# EAGLE board usbInterface (EAGLE 6.1)
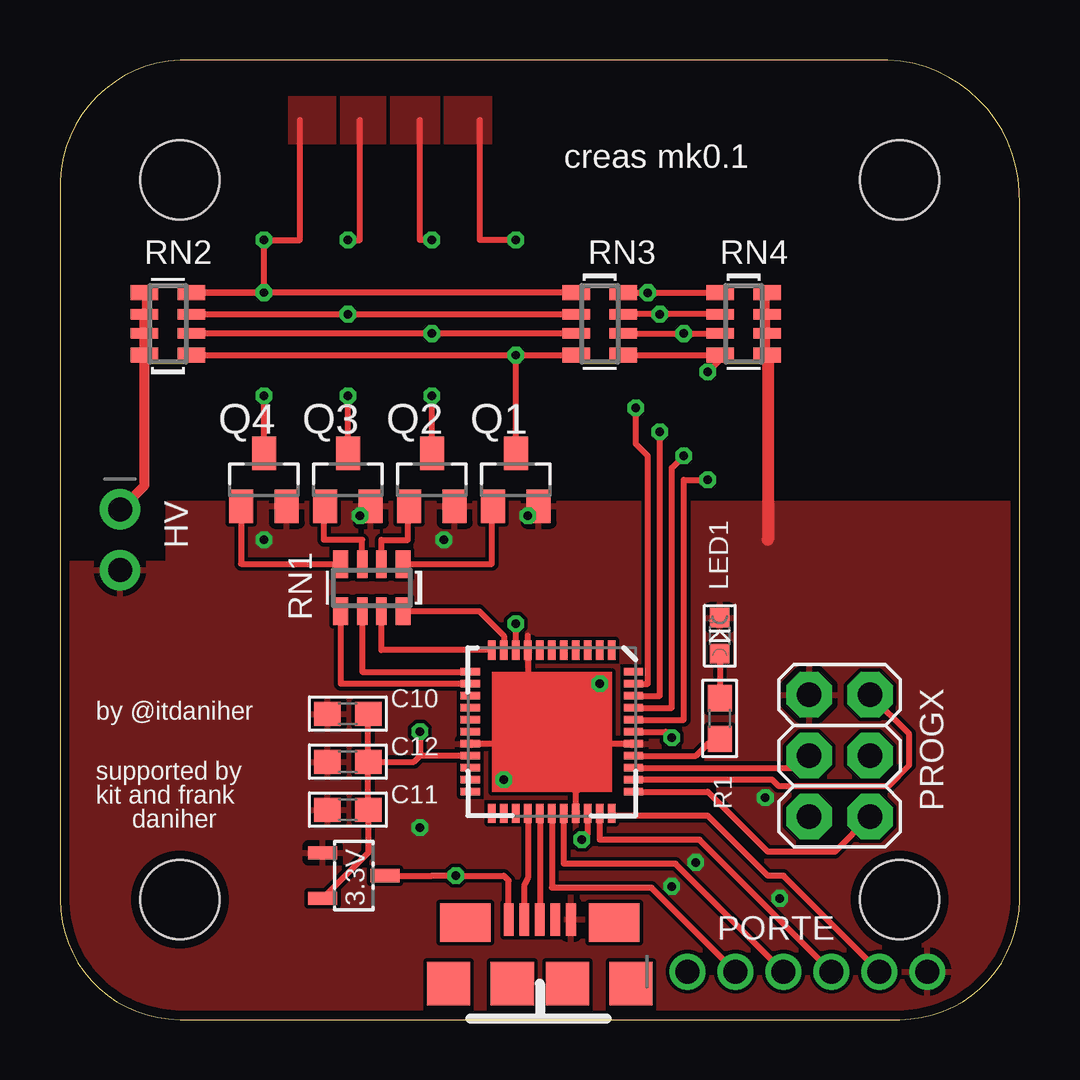
[diagram p0: board, top side]
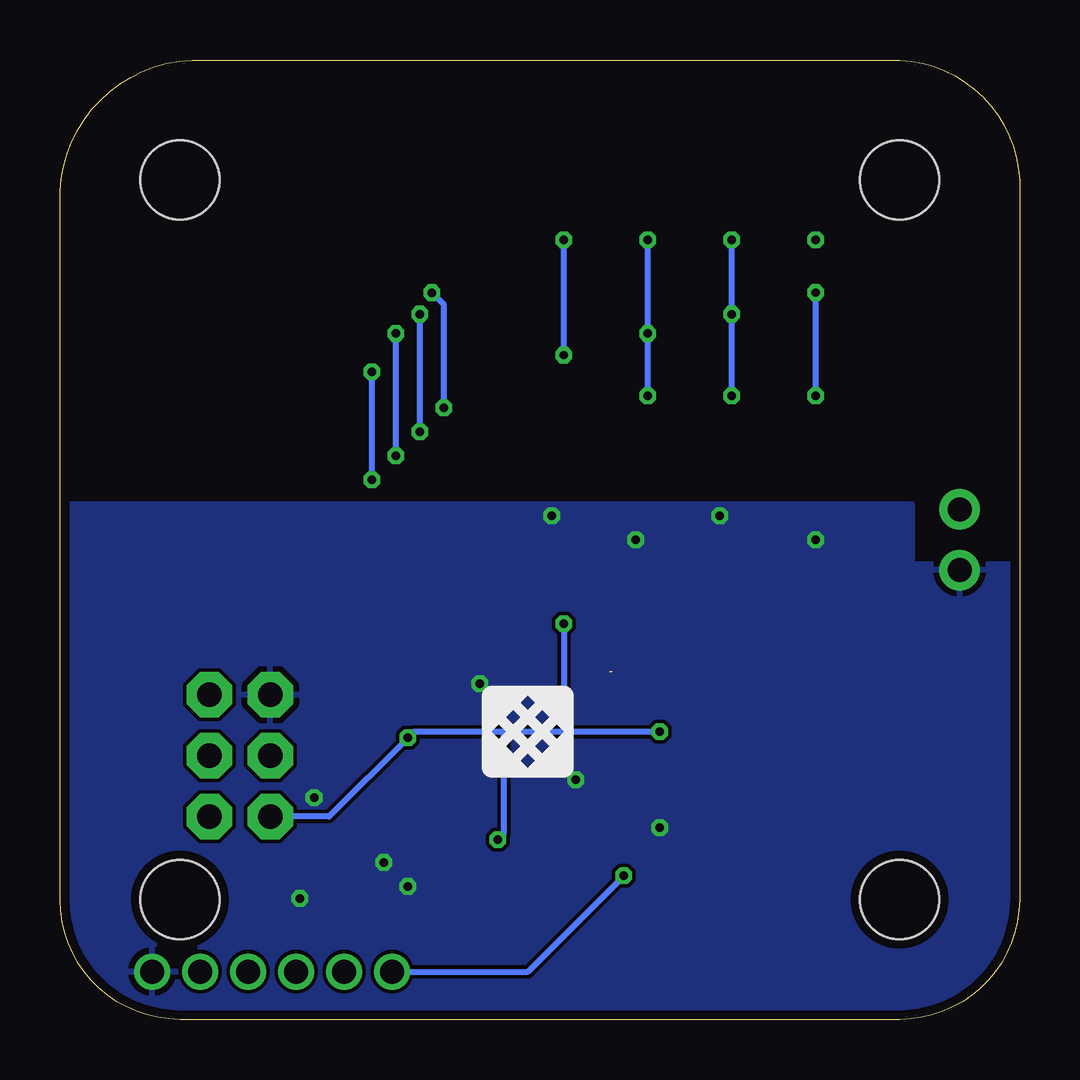
[diagram p1: board, bottom side, seen from below]

Size 40 x 40 mm. Coordinates in mm from the lower left corner, seen from the top.
Outline: 0,34.5 0,5 arc90 5,0 35,0 arc90 40,5 40,34 arc90 34.5,40 5,40 arc90 0,34.5
Copper layers (1*16): Top 0.0356mm / dielectric 1.5011mm / Bottom 0.0356mm
Design rules: minimum track width 6mil, minimum drill 13mil, track to track 6mil, track to pad 6mil, pad to pad 6mil, via to via 6mil, smd to smd 6mil, copper to edge 15mil, drill to drill 6mil, minimum pad ring 7mil, minimum via ring 7mil, stop-mask expansion 4mil, vias tented up to drill 0mil, thermal gap 10mil

## Footprints (pad centres in the part's own frame; a part is rotated, then mirrored left to right if it is on the bottom)
SOT23-3 = smd 0.55 x 1.2: 1 0.95,1.3; 2 -0.95,1.3; 3 0,-1.3
0603 = smd 1.1 x 1: 1 -0.85,0; 2 0.85,0
USB-MICROB = smd 0.4 x 1.35: P1 -1.3,2.675; P2 -0.65,2.675; P3 0,2.675; P4 0.65,2.675; P5 1.3,2.675 | smd 1.8 x 1.8: PAD-LB -1.15,0; PAD-LLB -3.8,0; PAD-RB 1.15,0; PAD-RRB 3.8,0 | smd 2.1 x 1.6: PAD-LT -3.1,2.55; PAD-RT 3.1,2.55
1X02_ROUND = drill 1 pad 1.676: 1 -1.27,0; 2 1.27,0
CHIPLED_0603 = smd 0.8 x 0.8: A 0,-0.75; C 0,0.75
1X06_ROUND_2MM = drill 1 pad 1.5: 1 0.16,0; 2 2.16,0; 3 4.16,0; 4 6.16,0; 5 8.16,0; 6 10.16,0
2X03 = drill 1.016 pad 1.88 octagon: 1 -2.54,-1.27; 2 -2.54,1.27; 3 0,-1.27; 4 0,1.27; 5 2.54,-1.27; 6 2.54,1.27
SOT23 = smd 1 x 1.4: 1 -0.95,-1.1; 2 0.95,-1.1; 3 0,1.1
RN8P-4R-CRA06S = smd 0.63 x 1.15: 1 -1.295,-0.975; 4 1.295,-0.975; 5 1.295,0.975; 8 -1.295,0.975 | smd 0.44 x 1.15: 2 -0.4,-0.975; 3 0.4,-0.975; 6 0.4,0.975; 7 -0.4,0.975
STAND-OFF = hole 3.302: 0,0
QFN-44 = smd 0.8 x 0.3: 1 -3.4,2.5; 2 -3.4,2; 3 -3.4,1.5; 4 -3.4,1; 5 -3.4,0.5; 6 -3.4,0; 7 -3.4,-0.5; 8 -3.4,-1; 9 -3.4,-1.5; 10 -3.4,-2; 11 -3.4,-2.5; 23 3.4,-2.5; 24 3.4,-2; 25 3.4,-1.5; 26 3.4,-1; 27 3.4,-0.5; 28 3.4,0; 29 3.4,0.5; 30 3.4,1; 31 3.4,1.5; 32 3.4,2; 33 3.4,2.5 | smd 0.3 x 0.8: 12 -2.5,-3.4; 13 -2,-3.4; 14 -1.5,-3.4; 15 -1,-3.4; 16 -0.5,-3.4; 17 0,-3.4; 18 0.5,-3.4; 19 1,-3.4; 20 1.5,-3.4; 21 2,-3.4; 22 2.5,-3.4; 34 2.5,3.4; 35 2,3.4; 36 1.5,3.4; 37 1,3.4; 38 0.5,3.4; 39 0,3.4; 40 -0.5,3.4; 41 -1,3.4; 42 -1.5,3.4; 43 -2,3.4; 44 -2.5,3.4

## Placement (x,y rotation side)
3.3V  VREG  [SOT23-3]  12.25,6 90 top
C10  1uF  [0603]  12,12.75 0 top
C11  .1uF  [0603]  12,8.75 0 top
C12  .01uF  [0603]  12,10.75 0 top
CN1  [USB-MICROB]  20,1.5 0 top
HV  [1X02_ROUND]  2.5,20 270 top
LED1  [CHIPLED_0603]  27.5,16 0 top
PORTE  [1X06_ROUND_2MM]  26,2 0 top
PROGX  [2X03]  32.5,11 90 top
Q1  [SOT23]  19,22.5 0 top
Q2  [SOT23]  15.5,22.5 0 top
Q3  [SOT23]  12,22.5 0 top
Q4  [SOT23]  8.5,22.5 0 top
R1  120o  [0603]  27.5,12.55 90 top
RN1  [RN8P-4R-CRA06S]  13,18 180 top
RN2  [RN8P-4R-CRA06S]  4.5,29 90 top
RN3  [RN8P-4R-CRA06S]  22.5,29 270 top
RN4  [RN8P-4R-CRA06S]  28.5,29 270 top
U$1  [STAND-OFF]  5,5 0 top
U$2  [STAND-OFF]  35,5 0 top
U$3  [STAND-OFF]  5,35 0 top
U$4  [STAND-OFF]  35,35 0 top
U$5  [LOGO_NONOLITH]  22.4,10.1 0 bottom
XM1  [QFN-44]  20.5,12 270 top

## Library data of the parts
3.3V C10-C12 CN1 HV PORTE PROGX R1 RN1-RN4 U$1-U$5 XM1 = nonolith
LED1 = microbuilder
Q1-Q4 = dp_devices

## Nets
3.3V: 3.3V.2 C10.2 C11.2 C12.2 PROGX.2 XM1.9 XM1.19 XM1.31 XM1.39
5V: 3.3V.3 CN1.P1 PORTE.1
ADCA: RN3.5 RN4.4 XM1.40
ADCB: RN3.6 RN4.3 XM1.41
ADCC: RN3.7 RN4.2 XM1.42
ADCD: RN3.8 RN4.1 XM1.43
BOOTLOAD: PROGX.4 XM1.36
CELLA: Q1.3 RN2.1 RN3.4
CELLB: Q2.3 RN2.2 RN3.3
CELLC: Q3.3 RN2.3 RN3.2
CELLD: Q4.3 RN2.4 RN3.1
GATEA: Q1.1 RN1.1
GATEB: Q2.1 RN1.2
GATEC: Q3.1 RN1.3
GATED: Q4.1 RN1.4
GND: 3.3V.1 C10.1 C11.1 C12.1 CN1.P5 HV.2 LED1.C PORTE.6 PROGX.6 Q1.2 Q2.2 Q3.2 Q4.2 RN4.5 RN4.6 RN4.7 RN4.8 XM1.8 XM1.18 XM1.30 XM1.38
HV: HV.1 RN2.5 RN2.6 RN2.7 RN2.8
OC0A: RN1.8 XM1.10
OC0B: RN1.7 XM1.11
OC0C: RN1.6 XM1.12
OC0D: RN1.5 XM1.13
PDI-CLK: PROGX.5 XM1.35
PDI-DATA: PROGX.1 XM1.34
PE0: PORTE.2 XM1.28
PE1: PORTE.3 XM1.29
PE2: PORTE.4 XM1.32
PE3: PORTE.5 XM1.33
PR1: R1.1 XM1.37
PR1-P: LED1.A R1.2
USB+: CN1.P3 XM1.27
USB-: CN1.P2 XM1.26

## Tracks (layer width: path | path; a pad name or v marks a point on that pad's centre or on a via)
3.3V  (via drill 0.35)
  Top 0.254: XM1.19 15,11 | v15,12 15,11 | v21.75,7.5 22,7.75 XM1.31 | C12.2 C10.2 | C12.2 C11.2 12.85,6.95 3.3V.2 | XM1.9 v19,16.5 | XM1.39 25.25,12 v25.5,11.75 | C12.2 14.75,10.75 15,11
  Bottom 0.254: v21.75,7.5 21.5,7.75 21.5,12 | v15,12 19,12 | 19,12 21.5,12 | v19,16.5 19,12 | 21.5,12 25.25,12 v25.5,11.75 28.79,8.46 PROGX.2
5V  (via drill 0.35)
  Top 0.254: CN1.P1 18.7,5.8 18.5,6 v16.5,6 15.5,6 3.3V.3
  Bottom 0.254: PORTE.1 20.5,2 v16.5,6
ADCA  (via drill 0.35)
  Top 0.254: XM1.40 26,12.5 26,22.5 v27,22.5 | RN3.5 RN4.4 27.53,27.73 27.5,27.75 27.5,27.5 v27,27
  Bottom 0.254: v27,22.5 v27,27
ADCB  (via drill 0.35)
  Top 0.254: XM1.41 25.5,13 25.5,23 v26,23.5 | RN3.6 v26,28.6 RN4.3
  Bottom 0.254: v26,23.5 v26,28.6
ADCC  (via drill 0.35)
  Top 0.254: XM1.42 25,13.5 v25,24.5 | RN4.2 v25,29.4 RN3.7
  Bottom 0.254: v25,24.5 v25,29.4
ADCD  (via drill 0.35)
  Top 0.254: XM1.43 24.5,14 24.5,23.5 24,24 v24,25.5 | RN3.8 v24.5,30.3 RN4.1
  Bottom 0.254: v24,25.5 24,29.8 v24.5,30.3
BOOTLOAD
  Top 0.254: XM1.36 30.73,10.5 PROGX.4
CELLA  (via drill 0.35)
  Top 0.254: RN2.1 v19,27.7 | v19,27.7 RN3.4 | Q1.3 v19,27.7 | v19,32.5 17.5,32.5 17.5,37.5
  Bottom 0.254: v19,27.7 v19,32.5
  pour Top (isolate 0.152, no thermals): 16,38.5 18,38.5 18,36.5 16,36.5
CELLB  (via drill 0.35)
  Top 0.254: RN3.3 v15.5,28.6 RN2.2 | Q2.3 v15.5,26 | v15.5,32.5 15,32.5 15,37.5
  Bottom 0.254: v15.5,26 v15.5,28.6 v15.5,32.5
  pour Top (isolate 0.152, rank 2, no thermals): 13.75,38.5 16,38.5 16,36.5 13.75,36.5
CELLC  (via drill 0.35)
  Top 0.254: RN2.3 v12,29.4 RN3.2 | Q3.3 v12,26 | v12,32.5 12.5,32.5 12.5,37.5
  Bottom 0.254: v12,26 v12,29.4 v12,32.5
  pour Top (isolate 0.152, rank 3, no thermals): 11.5,38.5 13.75,38.5 13.75,36.5 11.5,36.5
CELLD  (via drill 0.35)
  Top 0.254: RN3.1 RN2.4 v8.5,30.3 v8.5,32.5 10,32.5 10,37.5 | Q4.3 v8.5,26
  Bottom 0.254: v8.5,26 v8.5,30.3
  pour Top (isolate 0.152, no thermals): 9.5,38.5 11.5,38.5 11.5,36.5 9.5,36.5
GATEA
  Top 0.254: 14.3,19 18,19 18,21.4
  Top 0.406: RN1.1 14.3,19 | 18,21.4 Q1.1
GATEB
  Top 0.254: RN1.2 13.4,20 14.5,20 14.5,21.4
  Top 0.406: 14.5,21.4 Q2.1
GATEC
  Top 0.254: RN1.3 12.6,20 11,20 11,21.4
  Top 0.406: 11,21.4 Q3.1
GATED
  Top 0.254: Q4.1 7.55,19 11.71,19
  Top 0.406: RN1.4 11.71,19
GND  (via drill 0.35)
  Top 0.254: 19.5,16 XM1.8 19.5,11.5 | XM1.38 22.5,11.5 22.5,10.5 21.5,9.5 | XM1.30 21.5,9.5 | 21.5,9.5 19.75,11.25 | 19.75,11.25 19.5,11.5 | 19.5,11.5 XM1.18 | v18.5,10 18.5,11.25 19.75,11.25 | RN4.8 RN4.7 RN4.6 RN4.5
  Top 0.508: RN4.5 29.5,27.68 29.5,20
  other vias: 22.5,14 15,8 29.4,9.25 8.5,20 12.5,21 16,20 19.5,21 25.5,5.55 26.5,6.55 30,5.05
  pour Top (rank 6): 0,-4 41,-4 41,21.5 4.5,21.5 4.5,19 0,19
  pour Bottom: -5.5,-4 43.5,-4 41,21.5 4.5,21.5 4.5,19 -4.5,19
HV
  Top 0.254: RN2.5 RN2.6 RN2.7 RN2.8
  Top 0.406: HV.1 3.53,22.27 RN2.6
OC0A
  Top 0.254: RN1.8 17.48,17.02 18.5,16 XM1.10
OC0B
  Top 0.254: XM1.11 13.4,15.4 RN1.7
OC0C  (1 unrouted)
  Top 0.254: RN1.6 12.6,14.5 17,14.5
OC0D
  Top 0.254: RN1.5 11.7,14 XM1.13
PDI-CLK
  Top 0.254: XM1.35 29.69,10 29.94,9.75 34.55,9.75 35.41,10.61 35.41,11.9 PROGX.5
PDI-DATA
  Top 0.254: XM1.34 27,9.5 29.5,7 32.31,7 PROGX.1
PE0
  Top 0.254: XM1.28 20.5,5.5 24.66,5.5 PORTE.2
PE1
  Top 0.254: PORTE.3 25.66,6.5 21,6.5 XM1.29
PE2
  Top 0.254: PORTE.4 26.66,7.5 22.5,7.5 XM1.32
PE3
  Top 0.254: PORTE.5 30.16,6 29.5,6 27,8.5 23,8.5 XM1.33
PR1
  Top 0.254: XM1.37 26.5,11 27,11.5 R1.1
PR1-P
  Top 0.254: LED1.A R1.2
USB+
  Top 0.254: XM1.27 CN1.P3
USB-
  Top 0.254: XM1.26 19.5,5.9 19.35,5.55 CN1.P2

## Text on the board
tNames: creas mk0.1 | by @itdaniher | supported by | kit and frank | daniher